# Altium PCB Candunio.PcbDoc (part 1 of 2)
Units mm, origin at the board's own origin, x right, y up, seen from the top; angles counter-clockwise.
Board outline 46 x 46 mm, 2 copper layers (Top Layer, Bottom Layer); 41 components, 53 nets, 179 pads, 77 vias.
Unrouted connection lines stored in the file: 2.
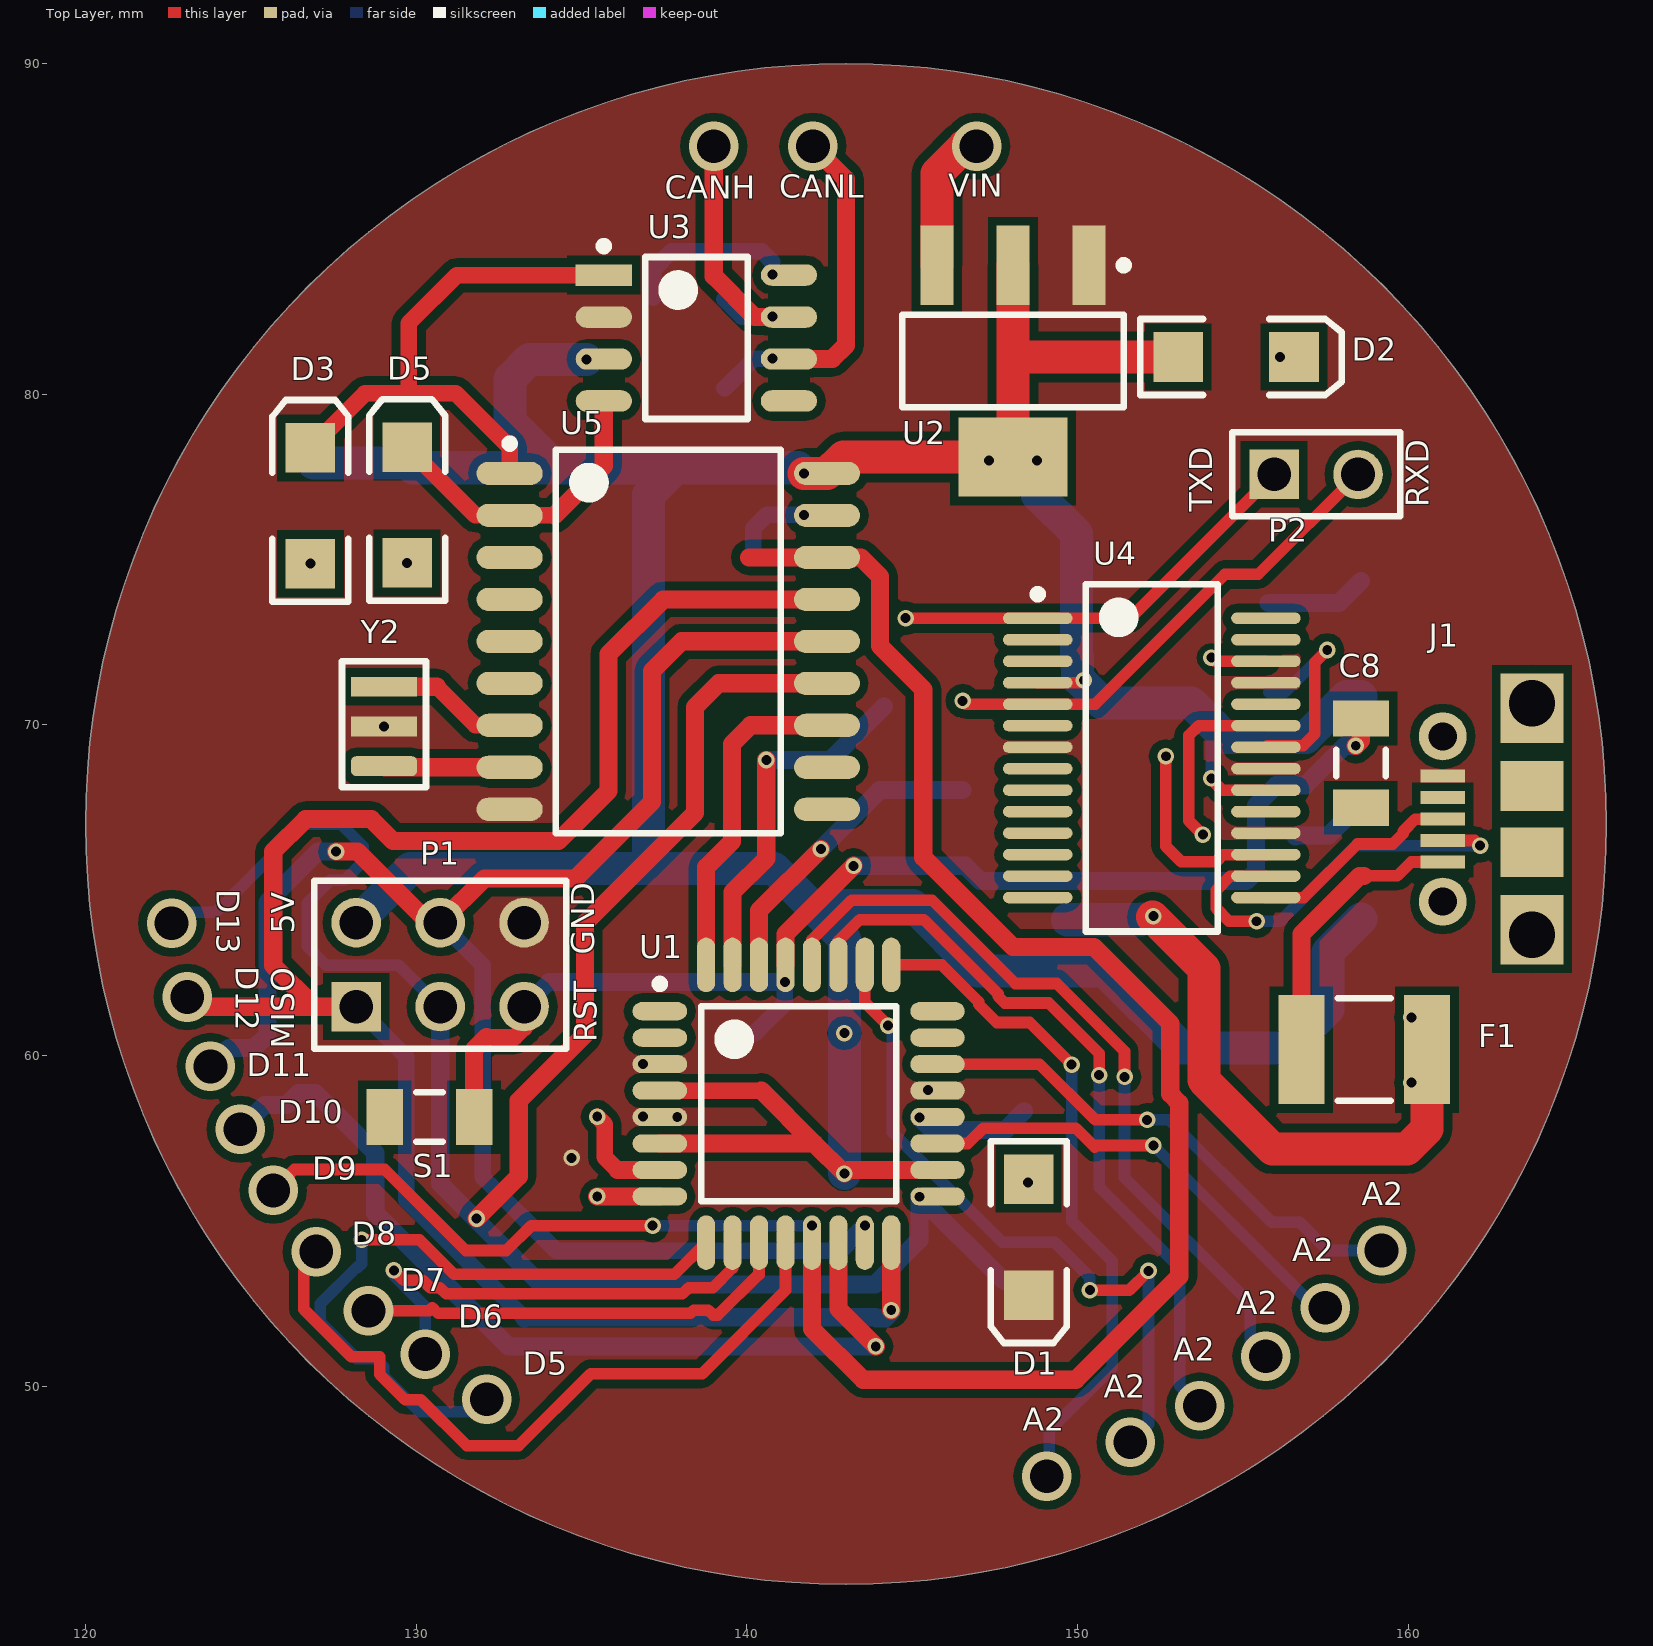
[diagram p0: Top Layer view]
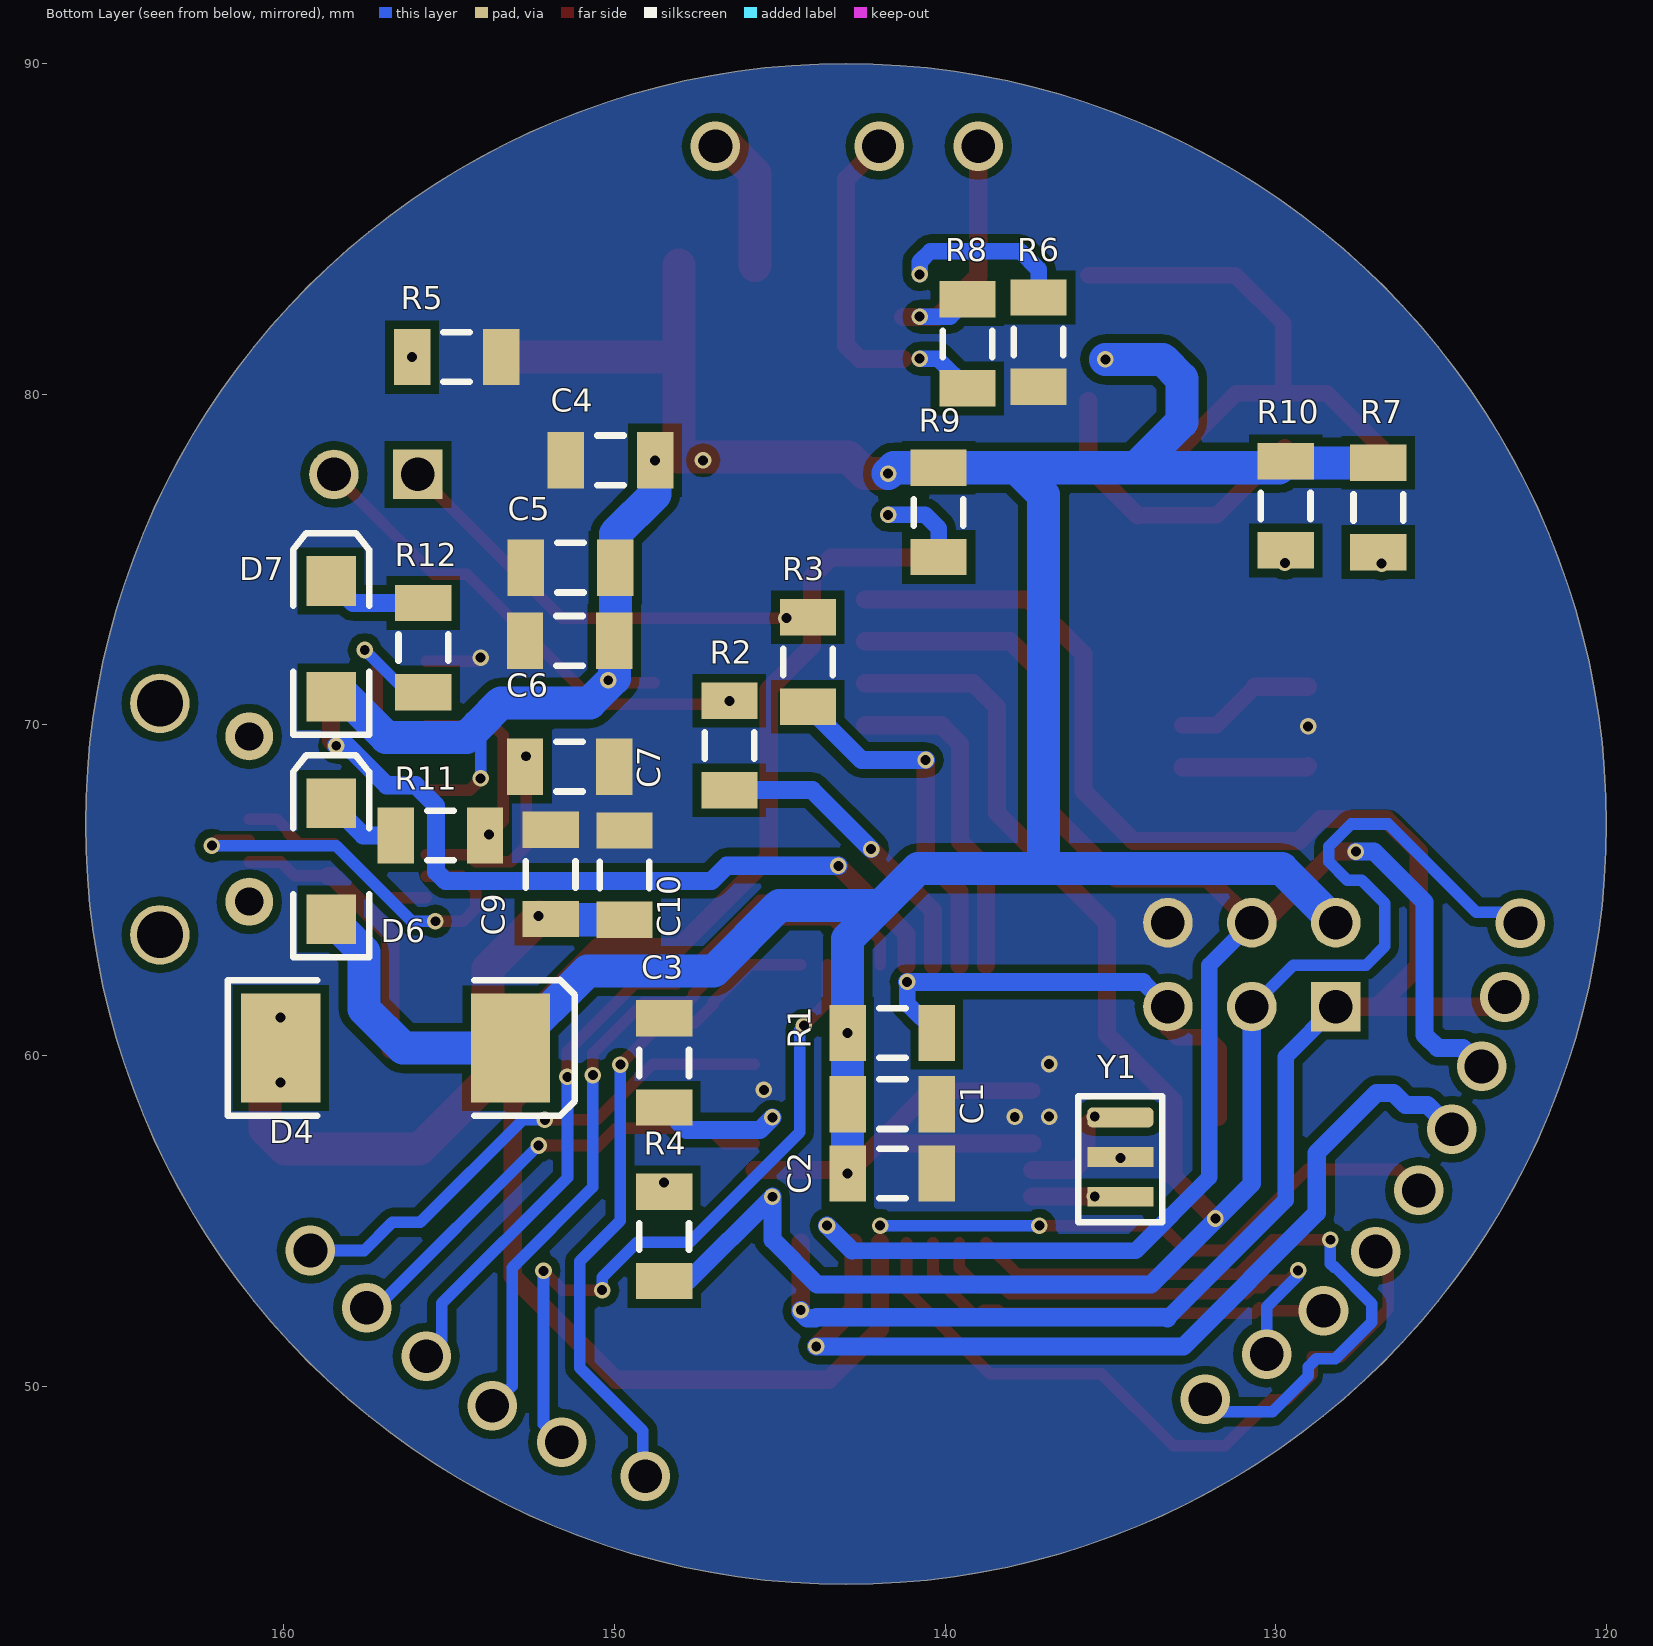
[diagram p1: Bottom Layer view, seen from below]

## Layer stack, top to bottom
Top Solder: solder mask 0.0102, Solder Resist, Dk 3.5
Top Layer: signal copper 0.0356
Dielectric 1: dielectric 0.32, FR-4, Dk 4.8
Bottom Layer: signal copper 0.0356
Bottom Solder: solder mask 0.0102, Solder Resist, Dk 3.5

## Board outline
120,67 cw(c143,67) 143,90 cw(c143,67) 166,67 cw(c143,67) 143,44 cw(c143,67) 120,67

## Design rules (kind name [scope] priority, off if disabled: settings)
Clearance [All] p1: gap=0.254 ignorepadtopadclearanceinfootprint=FALSE except(0: Arc-Hole Track-Hole SMDPad-Hole THPad-Hole Via-Hole Fill-Hole Poly-Hole Region-Hole Text-Hole; 0.24: Arc-Arc Arc-Track Arc-SMDPad Track-Track Track-SMDPad SMDPad-SMDPad)
PlaneConnect [All] p1: planeconnectstyle=Direct reliefexpansion=0.508 reliefentries=4 reliefconductorwidth=0.254 reliefairgap=0.254
PolygonConnect [All] p1: connectstyle=Direct reliefconductorwidth=0.254 reliefentries=4 polygonreliefangle="90 Angle" airgapwidth=0.254
RoutingVias [All] p1: holewidth=0.3 width=0.5 viastyle="Through Hole" minholewidth=0.3 minwidth=0.5 maxholewidth=0.3 maxwidth=0.5 viatemplateguid#1={BD94946F-5F4F-4AE1-884C-F64635037A37} viatemplatename#1=v50h30
SolderMaskExpansion [All] p1: expansion=0.102
Width [All] p1: maxlimit=1 minlimit=0.35 preferedwidth=0.55
29 further rules are at their usual default settings.

## Components (designator, comment, footprint, x,y, rotation, side; value= is the part's Value field where it differs from the comment)
C1 "Cap Pol3" C1206 141.6,58.525 r180 bottom value=4.7uF
C2 "1uF" C1206 141.6,56.425 r180 bottom
C3 "Cap Semi" C1206 148.5,59.775 r90 bottom value=100nF
C4 "1uF" C1206 150.125,78 r0 bottom
C5 "Cap Pol3" C1206 151.333,74.752 r0 bottom value=4.7uF
C6 "Cap Semi" C1206 151.359,72.542 r0 bottom value=100nF
C7 "Cap Semi" C1206 151.359,68.732 r180 bottom value=100nF
C8 "Cap Semi" C1206 158.575,68.842 r270 top value=100nF
C9 "Cap Pol3" C1206 151.931,65.477 r90 bottom value=4.7uF
C10 "1uF" C1206 149.696,65.455 r90 bottom
D1 "Red" 3.2X1.6X1.1 148.525,54.5 r270 top
D2 "Green" 3.2X1.6X1.1 154.8,81.125 r0 top
D3 "Yellow" 3.2X1.6X1.1 126.8,76.625 r90 top
D4 "Diode" SMC 156.625,60.225 r180 bottom
D5 "Yellow" 3.2X1.6X1.1 129.725,76.65 r90 top
D6 "Yellow" 3.2X1.6X1.1 158.575,65.875 r90 bottom
D7 "Yellow" 3.2X1.6X1.1 158.575,72.6 r90 bottom
F1 "Fuse 2" 1812 158.675,60.175 r180 top
J1 "USB micro B" 1050170001 163.75,67.15 r90 top
P1 "ICSP" HDR2X3_CEN 128.185,61.475 r0 top
P2 "Serial" HDR1X2 155.95,77.575 r0 top
R1 "1K" C1206 141.6,60.675 r180 bottom
R2 "1K" C1206 146.525,69.375 r90 bottom
R3 "1K" C1206 144.15,71.9 r90 bottom
R4 "1K" C1206 148.5,54.525 r270 bottom
R5 "1K" C1206 154.775,81.125 r180 bottom
R6 "16.9K" C1206 137.175,81.575 r90 bottom
R7 "1K" C1206 126.9,76.575 r270 bottom
R8 "120" C1206 139.325,81.525 r270 bottom
R9 "10K" C1206 140.2,76.425 r90 bottom
R10 "1K" C1206 129.7,76.625 r90 bottom
R11 "1K" C1206 155.27,66.65 r0 bottom
R12 "1K" C1206 155.787,72.333 r90 bottom
S1 "SW-PB" C1206 130.4,58.137 r180 top
U1 "ATmega328P-AU" 32A_N 141.569,58.537 r0 top
U2 "LM1117IMPX-5.0" MP04A_N 148.05,81 r270 top
U3 "MCP2551-E/SN" SOIC127P600X175-8M 138.475,81.7 r0 top
U4 "FT232RL-Reel" SSOP-28_N 152.25,69 r0 top
U5 "MCP2515-E/ST" SOIC127P1030X265-18M 137.625,72.525 r0 top
Y1 "CSTCE16M0V53-R0" CSTCE16M0V53-R0 134.7,58.125 r270 bottom
Y2 "CSTCE16M0V53-R0" CSTCE16M0V53-R0 129.025,68.75 r90 top

## Footprints (in the part's own frame and the unit in brackets; to place one, negate y for a bottom-side part, rotate by r counter-clockwise, add the part's x,y. Pads: shape width x height; smd on the part's side, far side on the other; paste and mask are expansions set on the pad)
3.2X1.6X1.1 [mm] "SMT LED; 2 Flat Leads"
  rect 1.5x1.5 smd: 1(-1.75,0) 2(1.75,0)
  silkscreen extent -2.9,-1.15 3.2,1.15
32A_N [mm] "Thin QFP, 32-Leads, Body 7x7mm, Pitch 0.8mm, IPC Medium Density"
  oval 1.65x0.55 smd: 1(-4.2,2.8) 2(-4.2,2) 3(-4.2,1.2) 4(-4.2,0.4) 5(-4.2,-0.4) 6(-4.2,-1.2) 7(-4.2,-2) 8(-4.2,-2.8) 17(4.2,-2.8) 18(4.2,-2) 19(4.2,-1.2) 20(4.2,-0.4) 21(4.2,0.4) 22(4.2,1.2) 23(4.2,2) 24(4.2,2.8)
  oval 0.55x1.65 smd: 9(-2.8,-4.2) 10(-2,-4.2) 11(-1.2,-4.2) 12(-0.4,-4.2) 13(0.4,-4.2) 14(1.2,-4.2) 15(2,-4.2) 16(2.8,-4.2) 25(2.8,4.2) 26(2,4.2) 27(1.2,4.2) 28(0.4,4.2) 29(-0.4,4.2) 30(-1.2,4.2) 31(-2,4.2) 32(-2.8,4.2)
  silkscreen extent -4.32,-2.95 2.95,3.75, body extent -3.5,-3.5 3.5,3.5, height 1.2
1812 [mm] "Chip Capacitor, Body 4.5x3.2mm, IPC High Density"
  rect 1.4x3.3 smd: 1(-1.9,0) 2(1.9,0)
  silkscreen extent -0.8,-1.55 0.8,1.55, body extent -2.4,-1.7 2.4,1.7, height 1.4
1050170001 [mm] "CONN USB MICRO MOLEX MODIFIED FOR DRILL HITS"
  round 1.8 hole 1.4: 0(-3.5,0) 0(3.5,0)
  rect 2.1x1.9 smd: 0(-3.35,0) 0(3.35,0)
  round 1.45 hole 0.85: 0(-2.5,2.7) 0(2.5,2.7)
  rect 1.5x1.9 smd: 0(-1,0) 0(1,0)
  rect 0.4x1.35 smd: 1(-1.3,2.7) 2(-0.65,2.7) 3(0,2.7) 4(0.65,2.7) 5(1.3,2.7)
  body extent -4.1,-2.5 4.1,2.9, height 2.78
C1206 [mm] "Chip Capacitor, Body 3.2x1.6mm, IPC High Density"
  rect 1.1x1.7 smd: 1(-1.35,0) 2(1.35,0)
  silkscreen extent -0.4,-0.75 0.4,0.75, body extent -1.7,-0.9 1.7,0.9, height 1.3
CSTCE16M0V53-R0 [mm] "16MHz Resonator"
  rrect50% 0.6x2 smd: 1(0,0)
  rect 0.6x2 smd: 2(1.2,0) 3(2.4,0)
  silkscreen extent -0.63,-1.27 3.18,1.27
HDR1X2 [mm] "Connector; Header; 2 Position"
  rect 1.5x1.5 hole 1.02: 1(0,0)
  round 1.5 hole 1.02: 2(2.54,0)
  silkscreen extent -1.27,-1.27 3.81,1.27
HDR2X3_CEN [mm] "Connector; Header; 3x2 Position"
  rect 1.5x1.5 hole 1.02: 1(0,0)
  round 1.5 hole 1.02: 2(2.54,0) 3(5.08,0) 4(0,2.54) 5(2.54,2.54) 6(5.08,2.54)
  silkscreen extent -1.27,-1.27 6.35,3.81
MP04A_N [mm] "SOT223, 4-Leads, Body 6.5x3.5mm, Pitch 2.3mm, Lead Span 7mm, IPC Medium Density"
  rect 2.4x1 smd: 1(-2.9,2.3) 2(-2.9,0) 3(-2.9,-2.3)
  rect 2.4x3.3 smd: 4(2.9,0)
  silkscreen extent -3.02,-3.35 1.4,3.48, body extent -1.85,-3.35 1.85,3.35, height 1.8
SMC [mm] "DO-214-AB/SMC; 2 C-Bend Leads; Body 7.9 x 5.9 mm, inc. leads (LxW)"
  rect 2.4x3.3 smd: 1(-3.475,0) 2(3.475,0)
  silkscreen extent -5.08,-2.05 5.42,2.05
SOIC127P600X175-8M [mm] "SOIC, 8-Leads, Body 4.90x3.90mm, Pitch 1.27mm, IPC Low Density"
  rect 1.7x0.65 smd: 1(-2.8,1.905)
  oval 1.7x0.65 smd: 2(-2.8,0.635) 3(-2.8,-0.635) 4(-2.8,-1.905) 5(2.8,-1.905) 6(2.8,-0.635) 7(2.8,0.635) 8(2.8,1.905)
  silkscreen extent -2.92,-2.45 1.55,2.9, body extent -1.95,-2.45 1.95,2.45, height 1.75
SOIC127P1030X265-18M [mm] "SOIC, 18-Leads, Body 11.50x7.50mm, Pitch 1.27mm, IPC Low Density"
  oval 2x0.7 smd: 1(-4.8,5.08) 2(-4.8,3.81) 3(-4.8,2.54) 4(-4.8,1.27) 5(-4.8,0) 6(-4.8,-1.27) 7(-4.8,-2.54) 8(-4.8,-3.81) 9(-4.8,-5.08) 10(4.8,-5.08) 11(4.8,-3.81) 12(4.8,-2.54) 13(4.8,-1.27) 14(4.8,0) 15(4.8,1.27) 16(4.8,2.54) 17(4.8,3.81) 18(4.8,5.08)
  silkscreen extent -4.92,-5.8 3.4,6.1, body extent -3.8,-5.8 3.8,5.8, height 2.65
SSOP-28_N [mm] "SOP, 28-Leads, Body 10.2x5.3mm, Pitch 0.65mm, IPC Medium Density"
  oval 2.1x0.35 smd: 1(-3.45,4.225) 2(-3.45,3.575) 3(-3.45,2.925) 4(-3.45,2.275) 5(-3.45,1.625) 6(-3.45,0.975) 7(-3.45,0.325) 8(-3.45,-0.325) 9(-3.45,-0.975) 10(-3.45,-1.625) 11(-3.45,-2.275) 12(-3.45,-2.925) 13(-3.45,-3.575) 14(-3.45,-4.225) 15(3.45,-4.225) 16(3.45,-3.575) 17(3.45,-2.925) 18(3.45,-2.275) 19(3.45,-1.625) 20(3.45,-0.975) 21(3.45,-0.325) 22(3.45,0.325) 23(3.45,0.975) 24(3.45,1.625) 25(3.45,2.275) 26(3.45,2.925) 27(3.45,3.575) 28(3.45,4.225)
  silkscreen extent -3.57,-5.25 2,5.25, body extent -2.8,-5.25 2.8,5.25, height 2

## Part data
C1 C5 C9: "Polarized Capacitor (Surface Mount)", Capacitance=4.7uF, Case/Package=1206, Case Code (Metric)=3216, Dielectric=X7R, Manufacturer="Kyocera AVX", Manufacturer Part Number=12063C475KAT2A, Max Operating Temperature=125°C, Min Operating Temperature=-55°C, Package Quantity=1, Supplier Part Number=1276-1055-1-ND, Tolerance=10%, Voltage=25V, Case Code (Imperial)=1206, ComponentLink1Description=https://datasheet.ciiva.com/2988/cx7r-2988115.pdf, ComponentLink1URL=https://datasheet.ciiva.com/2988/cx7r-2988115.pdf, ComponentLink2Description=https://datasheet.ciiva.com/7833/84526-7833366.pdf, ComponentLink2URL=https://datasheet.ciiva.com/7833/84526-7833366.pdf, ComponentLink3Description=https://datasheet.ciiva.com/16315/cx7r-16315830.pdf, ComponentLink3URL=https://datasheet.ciiva.com/16315/cx7r-16315830.pdf, ComponentLink4Description=https://datasheet.ciiva.com/153/cx7r-153207.pdf, ComponentLink4URL=https://datasheet.ciiva.com/153/cx7r-153207.pdf, ComponentLink5Description=https://datasheet.ciiva.com/7833/84526-7833367.pdf, ComponentLink5URL=https://datasheet.ciiva.com/7833/84526-7833367.pdf, ComponentLink6Description=https://datasheet.ciiva.com/153/cx7r-153208.pdf, ComponentLink6URL=https://datasheet.ciiva.com/153/cx7r-153208.pdf, ComponentLink7Description=https://datasheet.ciiva.com/7833/cx7r-7833368.pdf, ComponentLink7URL=https://datasheet.ciiva.com/7833/cx7r-7833368.pdf, ComponentLink8Description=https://datasheet.ciiva.com/153/cx7r-153209.pdf, ComponentLink8URL=https://datasheet.ciiva.com/153/cx7r-153209.pdf, ComponentLink9Description=https://datasheet.ciiva.com/5417/cx7r-218113-5417949.pdf, ComponentLink9URL=https://datasheet.ciiva.com/5417/cx7r-218113-5417949.pdf, ComponentLink10Description=https://datasheet.ciiva.com/28611/cx7r-28611725.pdf, ComponentLink10URL=https://datasheet.ciiva.com/28611/cx7r-28611725.pdf, ComponentLink11Description=https://datasheet.ciiva.com/11786/0900766b80dc2409-11786382.pdf, ComponentLink11URL=https://datasheet.ciiva.com/11786/0900766b80dc2409-11786382.pdf, Contact Plating=Tin,Matte, Depth=1.6mm, Height=1.78mm, LatestRevisionDate=29-May-2009, LatestRevisionNote="IPC-7351 Footprint Added.", Lead Free="Lead Free", Length=3.2mm, Mount="Surface Mount", Number of Pins=2, PackageDescription="Chip Capacitor", PackageReference=C0805, Packaging="Tape and Reel", Pricing 1="1=0.5, 10=0.345, 100=0.207, 500=0.15526, 1000=0.1311 (USD)", Published=8-Jun-2000, Publisher="Altium Limited", Radiation Hardening=No, REACH SVHC="No SVHC", Stock 1=0, Supplier 1=Digi-Key, Supplier 2=Digi-Key, Termination=SMD/SMT, Thickness=0.07inch, Voltage Rating=25V, Voltage Rating (DC)=25V, Width=0.063inch
C2 C4 C10: library part "Cap Semi", "Capacitor (Semiconductor SIM Model)", Case/Package=1206, Case Code (Metric)=3216, Dielectric=X7R, Manufacturer=Murata, Manufacturer Part Number=GRM31MR71H105KA88L, Max Operating Temperature=125°C, Min Operating Temperature=-55°C, Package Quantity=1, Supplier Part Number=490-14756-1-ND, Tolerance=10%, Voltage=50V, Capacitance=1uF, Case Code (Imperial)=1206, ComponentLink1Description=https://datasheet.ciiva.com/16379/product-16379616.pdf, ComponentLink1URL=https://datasheet.ciiva.com/16379/product-16379616.pdf, ComponentLink2Description=https://datasheet.ciiva.com/14116/nmgrm-data-en-14116709.pdf, ComponentLink2URL=https://datasheet.ciiva.com/14116/nmgrm-data-en-14116709.pdf, ComponentLink3Description=https://datasheet.ciiva.com/22703/608985-22703384.pdf, ComponentLink3URL=https://datasheet.ciiva.com/22703/608985-22703384.pdf, ComponentLink4Description=https://datasheet.ciiva.com/3777/42grm31mr71h105ka8823-3777081.pdf, ComponentLink4URL=https://datasheet.ciiva.com/3777/42grm31mr71h105ka8823-3777081.pdf, ComponentLink5Description=https://datasheet.ciiva.com/6270/partnumbering-e-01-6270398.pdf, ComponentLink5URL=https://datasheet.ciiva.com/6270/partnumbering-e-01-6270398.pdf, ComponentLink6Description=https://datasheet.ciiva.com/6270/partnumbering-e-01-6270399.pdf, ComponentLink6URL=https://datasheet.ciiva.com/6270/partnumbering-e-01-6270399.pdf, ComponentLink7Description=https://datasheet.ciiva.com/29199/455056-da-01-en-vs-kondensator-1206-29199449.pdf, ComponentLink7URL=https://datasheet.ciiva.com/29199/455056-da-01-en-vs-kondensator-1206-29199449.pdf, ComponentLink8Description=https://datasheet.ciiva.com/29202/450923-da-01-de-vs-chip-kond-1206-1-0-uf-10pr-50-0v-x7r-29202718.pdf, ComponentLink8URL=https://datasheet.ciiva.com/29202/450923-da-01-de-vs-chip-kond-1206-1-0-uf-10pr-50-0v-x7r-29202718.pdf, Depth=1.6mm, Height=1.15mm, LatestRevisionDate=29-May-2009, LatestRevisionNote="IPC-7351 Footprint Added.", Lead Free="Lead Free", Length=3.2mm, Material=Ceramic, Mount="Surface Mount", Number of Pins=2, PackageDescription="Chip Capacitor", PackageReference=C1206, Packaging="Tape and Reel", Published=8-Jun-2000, Publisher="Altium Limited", REACH SVHC="No SVHC", Stock 1=0, Supplier 1=Digi-Key, Supplier 2=Digi-Key, Termination=SMD/SMT, Thickness=0.049inch, Voltage Rating=50V, Voltage Rating (DC)=50V, Width=0.063inch
C3 C6 C7 C8: "Capacitor (Semiconductor SIM Model)", Capacitance=100nF, Case/Package=1206, Case Code (Metric)=3216, Dielectric=X7R, Dielectric Material=Ceramic, Manufacturer=Yageo, Manufacturer Part Number=CC1206KKX7R0BB104, Max Operating Temperature=125°C, Min Operating Temperature=-55°C, Package Quantity=1, Supplier Part Number=1276-1151-1-ND, Tolerance=10%, Voltage=63V, Voltage Rating=100V, Case Code (Imperial)=1206, ComponentLink1Description=https://datasheet.ciiva.com/180/mlccorderingcode-180144.pdf, ComponentLink1URL=https://datasheet.ciiva.com/180/mlccorderingcode-180144.pdf, ComponentLink2Description=https://datasheet.ciiva.com/180/mlccorderingcode-180145.pdf, ComponentLink2URL=https://datasheet.ciiva.com/180/mlccorderingcode-180145.pdf, ComponentLink3Description=https://datasheet.ciiva.com/180/mlccorderingcode-180146.pdf, ComponentLink3URL=https://datasheet.ciiva.com/180/mlccorderingcode-180146.pdf, ComponentLink4Description=https://datasheet.ciiva.com/7978/1447671-7978227.pdf, ComponentLink4URL=https://datasheet.ciiva.com/7978/1447671-7978227.pdf, ComponentLink5Description=https://datasheet.ciiva.com/5425/upy-gp-np0-16v-to-50v-8-5425573.pdf, ComponentLink5URL=https://datasheet.ciiva.com/5425/upy-gp-np0-16v-to-50v-8-5425573.pdf, ComponentLink6Description=https://datasheet.ciiva.com/26829/getdatasheetpartid-403790-26829655.pdf, ComponentLink6URL=https://datasheet.ciiva.com/26829/getdatasheetpartid-403790-26829655.pdf, ComponentLink7Description=https://datasheet.ciiva.com/46391/1919308-46391993.pdf, ComponentLink7URL=https://datasheet.ciiva.com/46391/1919308-46391993.pdf, ComponentLink8Description=https://datasheet.ciiva.com/16981/upy-np0x7r-mv-100-to-630v-9-16981180.pdf, ComponentLink8URL=https://datasheet.ciiva.com/16981/upy-np0x7r-mv-100-to-630v-9-16981180.pdf, Composition=Ceramic, Depth=1.6mm, Height=1.25mm, LatestRevisionDate=29-May-2009, LatestRevisionNote="IPC-7351 Footprint Added.", Lead Free="Lead Free", Length=3.2mm, Mount="Surface Mount", Number of Pins=2, PackageDescription="Chip Capacitor", PackageReference=C1206, Packaging="Tape and Reel", Pricing 1="1=0.32, 10=0.221, 100=0.1117, 500=0.07646, 1000=0.06763 (USD)", Published=8-Jun-2000, Publisher="Altium Limited", Radiation Hardening=No, REACH SVHC="No SVHC", Stock 1=0, Supplier 1=Digi-Key, Supplier 2=Digi-Key, Termination=SMD/SMT, Thickness=0.057inch, Voltage Rating (DC)=100V, Width=0.063inch
D1: library part LED2, "Typical RED, GREEN, YELLOW, AMBER GaAs LED", Case/Package=1206, Case Code (Metric)=3216, Colour=Yellow, Forward Current=20mA, Forward Voltage=2.1V, Lens Colour=White,Clear, Manufacturer="Broadcom Avago", Manufacturer Part Number=HSMY-C150, Max Operating Temperature=85°C, Max Power Dissipation=65mW, Min Operating Temperature=-40°C, Package Quantity=1, Reverse Voltage=5V, Supplier Part Number=516-1440-1-ND, Case Code (Imperial)=1206, ComponentLink1Description=https://datasheet.ciiva.com/15117/getdatasheetpartid-110528-15117488.pdf, ComponentLink1URL=https://datasheet.ciiva.com/15117/getdatasheetpartid-110528-15117488.pdf, ComponentLink2Description=https://datasheet.ciiva.com/11774/0900766b804a6539-11774578.pdf, ComponentLink2URL=https://datasheet.ciiva.com/11774/0900766b804a6539-11774578.pdf, ComponentLink3Description=https://datasheet.ciiva.com/19466/1557071-19466435.pdf, ComponentLink3URL=https://datasheet.ciiva.com/19466/1557071-19466435.pdf, ComponentLink4Description=https://datasheet.ciiva.com/14172/swseriehsmx-c150toc190-e-14172159.pdf, ComponentLink4URL=https://datasheet.ciiva.com/14172/swseriehsmx-c150toc190-e-14172159.pdf, ComponentLink5Description=https://datasheet.ciiva.com/29280/180507-da-01-en-chip-led-hsmy-c150-gelb-29280997.pdf, ComponentLink5URL=https://datasheet.ciiva.com/29280/180507-da-01-en-chip-led-hsmy-c150-gelb-29280997.pdf, ComponentLink6Description=https://datasheet.ciiva.com/11773/0900766b804a6539-11773956.pdf, ComponentLink6URL=https://datasheet.ciiva.com/11773/0900766b804a6539-11773956.pdf, ComponentLink7Description=https://datasheet.ciiva.com/15117/getdatasheetpartid-142358-15117749.pdf, ComponentLink7URL=https://datasheet.ciiva.com/15117/getdatasheetpartid-142358-15117749.pdf, ComponentLink8Description=https://datasheet.ciiva.com/46426/313031-46426533.pdf, ComponentLink8URL=https://datasheet.ciiva.com/46426/313031-46426533.pdf, ComponentLink9Description=https://datasheet.ciiva.com/14172/swseriehsmx-c150toc190-e-14172156.pdf, ComponentLink9URL=https://datasheet.ciiva.com/14172/swseriehsmx-c150toc190-e-14172156.pdf, ComponentLink10Description=https://datasheet.ciiva.com/29281/180509-da-01-en-chip-led-hsmh-c150-rot-29281009.pdf, ComponentLink10URL=https://datasheet.ciiva.com/29281/180509-da-01-en-chip-led-hsmh-c150-rot-29281009.pdf, Contact Plating=Gold, Depth=1.6mm, Dominant Wavelength=586nm, Height=1.1mm, Illumination Colour=Yellow, LatestRevisionDate=17-Jul-2002, LatestRevisionNote="Re-released for DXP Platform.", Lead Free="Lead Free", Length=3.2mm, Lens Style=Diffused,Colorless,Rectangular, Lens Transparency=Diffused, Luminous Intensity=8mcd, Mount="Surface Mount", Number of Elements=1, Number of LEDs=1, Number of Pins=2, PackageDescription="SM LED; 2 Flat Leads", PackageReference=3.2X1.6X1.1, PackageVersion=Feb-2002, Packaging="Tape and Reel", Power Dissipation=65mW, Power Rating=65mW, Published=8-Jun-2000, Publisher="Altium Limited", Radiation Hardening=No, REACH SVHC="No SVHC", Stock 1=0, Stock 2=0, Supplier 1=Digi-Key, Supplier 2=Digi-Key, Supplier 3=Digi-Key, Supplier 4=Digi-Key, Test Current=20mA, Viewing Angle=170°, Voltage Rating (DC)=2.1V, Wavelength=586nm, Width=1.6mm
D2: library part LED2, "Typical RED, GREEN, YELLOW, AMBER GaAs LED", Case/Package=1206, Case Code (Metric)=3216, Colour=Green,Yellow, Forward Current=20mA, Forward Voltage=2.2V, Lens Colour=White,Clear, Manufacturer="Broadcom Avago", Manufacturer Part Number=HSMG-C150, Max Operating Temperature=85°C, Max Power Dissipation=65mW, Min Operating Temperature=-30°C, Package Quantity=1, Reverse Voltage=5V, Supplier Part Number=516-1443-1-ND, Case Code (Imperial)=1206, ComponentLink1Description=https://datasheet.ciiva.com/11774/0900766b804a6539-11774272.pdf, ComponentLink1URL=https://datasheet.ciiva.com/11774/0900766b804a6539-11774272.pdf, ComponentLink2Description=https://datasheet.ciiva.com/14172/swseriehsmx-c150toc190-e-14172162.pdf, ComponentLink2URL=https://datasheet.ciiva.com/14172/swseriehsmx-c150toc190-e-14172162.pdf, ComponentLink3Description=https://datasheet.ciiva.com/46426/313031-46426517.pdf, ComponentLink3URL=https://datasheet.ciiva.com/46426/313031-46426517.pdf, ComponentLink4Description=https://datasheet.ciiva.com/15117/getdatasheetpartid-110366-15117482.pdf, ComponentLink4URL=https://datasheet.ciiva.com/15117/getdatasheetpartid-110366-15117482.pdf, ComponentLink5Description=https://datasheet.ciiva.com/19466/1556369-19466015.pdf, ComponentLink5URL=https://datasheet.ciiva.com/19466/1556369-19466015.pdf, ComponentLink6Description=https://datasheet.ciiva.com/29280/180668-da-01-en-chip-led-hsmg-c150-gelb-gruen-29280632.pdf, ComponentLink6URL=https://datasheet.ciiva.com/29280/180668-da-01-en-chip-led-hsmg-c150-gelb-gruen-29280632.pdf, Contact Plating=Gold, Depth=1.6mm, Dominant Wavelength=572nm, Height=1.1mm, Illumination Colour=Green, LatestRevisionDate=17-Jul-2002, LatestRevisionNote="Re-released for DXP Platform.", Length=3.2mm, Lens Style=Diffused,Colorless,Rectangular, Lens Transparency=Diffused, Luminous Intensity=15mcd, Mount="Surface Mount", Number of Elements=1, Number of LEDs=1, Number of Pins=2, PackageDescription="SM LED; 2 Flat Leads", PackageReference=3.2X1.6X1.1, PackageVersion=Feb-2002, Packaging="Tape and Reel", Power Dissipation=65mW, Power Rating=65mW, Published=8-Jun-2000, Publisher="Altium Limited", Radiation Hardening=No, REACH SVHC="No SVHC", Supplier 1=Digi-Key, Supplier 2=Digi-Key, Test Current=20mA, Viewing Angle=170°, Wavelength=572nm, Width=1.6mm
D3 D5 D6 D7: library part LED2, "Typical RED, GREEN, YELLOW, AMBER GaAs LED", Case/Package=1206, Case Code (Metric)=3216, Forward Current=20mA, Forward Voltage=2.1V, Lens Colour=White,Clear, Manufacturer="Broadcom Avago", Manufacturer Part Number=HSMY-C150, Max Operating Temperature=85°C, Max Power Dissipation=65mW, Min Operating Temperature=-40°C, Package Quantity=1, Reverse Voltage=5V, Supplier Part Number=516-1442-1-ND, Case Code (Imperial)=1206, Colour=Yellow, ComponentLink1Description=https://datasheet.ciiva.com/15117/getdatasheetpartid-110528-15117488.pdf, ComponentLink1URL=https://datasheet.ciiva.com/15117/getdatasheetpartid-110528-15117488.pdf, ComponentLink2Description=https://datasheet.ciiva.com/11774/0900766b804a6539-11774578.pdf, ComponentLink2URL=https://datasheet.ciiva.com/11774/0900766b804a6539-11774578.pdf, ComponentLink3Description=https://datasheet.ciiva.com/19466/1557071-19466435.pdf, ComponentLink3URL=https://datasheet.ciiva.com/19466/1557071-19466435.pdf, ComponentLink4Description=https://datasheet.ciiva.com/14172/swseriehsmx-c150toc190-e-14172159.pdf, ComponentLink4URL=https://datasheet.ciiva.com/14172/swseriehsmx-c150toc190-e-14172159.pdf, ComponentLink5Description=https://datasheet.ciiva.com/29280/180507-da-01-en-chip-led-hsmy-c150-gelb-29280997.pdf, ComponentLink5URL=https://datasheet.ciiva.com/29280/180507-da-01-en-chip-led-hsmy-c150-gelb-29280997.pdf, Contact Plating=Gold, Depth=1.6mm, Dominant Wavelength=586nm, Height=1.1mm, Illumination Colour=Yellow, LatestRevisionDate=17-Jul-2002, LatestRevisionNote="Re-released for DXP Platform.", Lead Free="Lead Free", Length=3.2mm, Lens Style=Diffused,Colorless,Rectangular, Lens Transparency=Diffused, Luminous Intensity=8mcd, Mount="Surface Mount", Number of Elements=1, Number of LEDs=1, Number of Pins=2, PackageDescription="SM LED; 2 Flat Leads", PackageReference=3.2X1.6X1.1, PackageVersion=Feb-2002, Packaging="Tape and Reel", Power Dissipation=65mW, Power Rating=65mW, Published=8-Jun-2000, Publisher="Altium Limited", Radiation Hardening=No, REACH SVHC="No SVHC", Stock 1=0, Supplier 1=Digi-Key, Supplier 2=Digi-Key, Test Current=20mA, Viewing Angle=170°, Voltage Rating (DC)=2.1V, Wavelength=586nm, Width=1.6mm
D4: "Default Diode", Supplier Part Number=SS1P3L-M3/84AGICT-ND, Code_JEDEC=DO-214-AB, LatestRevisionDate=17-Jul-2002, LatestRevisionNote="Re-released for DXP Platform.", PackageDescription="DO-214-AB/SMC; 2 C-Bend Leads; Body 7.9 x 5.9 mm, inc. leads (LxW)", PackageReference=SMC, PackageVersion=Sep-1996, Published=8-Jun-2000, Publisher="Altium Limited", Supplier 1=Digi-Key, Supplier 2=Digi-Key
F1: "Fuse", Case/Package=1812, Case Code (Metric)=4532, Current Rating=100A, Hold Current=500mA, Manufacturer=Bourns, Manufacturer Part Number=MF-MSMF050-2, Max Operating Temperature=85°C, Min Operating Temperature=-40°C, Operating Supply Voltage=15V, Package Quantity=2000, Power Dissipation=800mW, Resistance=150mR, Supplier Part Number=?MF-MSMF050-2CT-ND, Trip Current=1A, Approvals=UL,CSA,TUV, Case Code (Imperial)=1812, ComponentLink1Description=https://datasheet.ciiva.com/326/mfmsmf-326354.pdf, ComponentLink1URL=https://datasheet.ciiva.com/326/mfmsmf-326354.pdf, ComponentLink2Description=https://datasheet.ciiva.com/1228/1786007-1228155.pdf, ComponentLink2URL=https://datasheet.ciiva.com/1228/1786007-1228155.pdf, ComponentLink3Description=https://datasheet.ciiva.com/16205/mfmsmf-16205994.pdf, ComponentLink3URL=https://datasheet.ciiva.com/16205/mfmsmf-16205994.pdf, ComponentLink4Description=https://datasheet.ciiva.com/34302/1164200-34302041.pdf, ComponentLink4URL=https://datasheet.ciiva.com/34302/1164200-34302041.pdf, ComponentLink5Description=https://datasheet.ciiva.com/14537/70153434-14537737.pdf, ComponentLink5URL=https://datasheet.ciiva.com/14537/70153434-14537737.pdf, ComponentLink6Description=https://datasheet.ciiva.com/46395/1695373-46395287.pdf, ComponentLink6URL=https://datasheet.ciiva.com/46395/1695373-46395287.pdf, ComponentLink7Description=https://datasheet.ciiva.com/22749/1695373-22749079.pdf, ComponentLink7URL=https://datasheet.ciiva.com/22749/1695373-22749079.pdf, ComponentLink8Description=https://datasheet.ciiva.com/32426/mf-msmf-series-eng-tds-32426126.pdf, ComponentLink8URL=https://datasheet.ciiva.com/32426/mf-msmf-series-eng-tds-32426126.pdf, ComponentLink9Description=https://datasheet.ciiva.com/4501/mfmsmf-72300-4501655.pdf, ComponentLink9URL=https://datasheet.ciiva.com/4501/mfmsmf-72300-4501655.pdf, ComponentLink10Description=https://datasheet.ciiva.com/3019/mfmsmf-3019622.pdf, ComponentLink10URL=https://datasheet.ciiva.com/3019/mfmsmf-3019622.pdf, ComponentLink11Description=https://datasheet.ciiva.com/3019/mfmsmf-3019621.pdf, ComponentLink11URL=https://datasheet.ciiva.com/3019/mfmsmf-3019621.pdf, ComponentLink12Description=https://datasheet.ciiva.com/326/mfmsmf-326356.pdf, ComponentLink12URL=https://datasheet.ciiva.com/326/mfmsmf-326356.pdf, ComponentLink13Description=https://datasheet.ciiva.com/1274/1786007-1274499.pdf, ComponentLink13URL=https://datasheet.ciiva.com/1274/1786007-1274499.pdf, ComponentLink14Description=https://datasheet.ciiva.com/326/mfmsmf-326355.pdf, ComponentLink14URL=https://datasheet.ciiva.com/326/mfmsmf-326355.pdf, ComponentLink15Description=https://datasheet.ciiva.com/1274/1786007-1274498.pdf, ComponentLink15URL=https://datasheet.ciiva.com/1274/1786007-1274498.pdf, ComponentLink16Description=https://datasheet.ciiva.com/15226/getdatasheetpartid-117168-15226886.pdf, ComponentLink16URL=https://datasheet.ciiva.com/15226/getdatasheetpartid-117168-15226886.pdf, ComponentLink17Description=https://datasheet.ciiva.com/25894/mfmsmf-25894175.pdf, ComponentLink17URL=https://datasheet.ciiva.com/25894/mfmsmf-25894175.pdf, Contact Plating=Gold, Height=0.85mm, LatestRevisionDate=17-Jul-2002, LatestRevisionNote="Re-released for DXP Platform.", Lead Free="Lead Free", Length=4.73mm, Max Current Rating=100A, Mount="Surface Mount,PCB", Number of Terminals=2, PackageDescription="Thru-Hole; 2 Leads", PackageReference=PIN-W2/E2.8, Packaging="Tape and Reel", Part number=MF-MSMF050-2, Pricing 1="2000=0.2898, 4000=0.28463, 6000=0.27945, 10000=0.2691 (USD)", Published=8-Jun-2000, Publisher="Altium Limited", Radiation Hardening=No, REACH SVHC="No SVHC", Stock 1=126000, Supplier 1=Digi-Key, Terminal Material=Gold, Termination=SMD/SMT, Time to Trip=0.15s, Voltage Rating=15V, Voltage Rating (DC)=15V, Width=3.41mm
J1: library part 1050170001, "CONN SM TH USB MICRO MODIFIED FOR DRILL", Part number=WM1399CT-ND, Supplier Part Number=609-4618-1-ND, Details="Modified from reference footprint for standard drill hits (rather than slots)", Supplier 1=Digi-Key
P1: library part "Header 3X2A", "Header, 3-Pin, Dual row", LatestRevisionDate=17-Jul-2002, LatestRevisionNote="Re-released for DXP Platform.", Publisher="Altium Limited"
P2: library part "Header 2", "Header, 2-Pin", LatestRevisionDate=17-Jul-2002, LatestRevisionNote="Re-released for DXP Platform.", Publisher="Altium Limited"
R1 R2 R3 R4 R5 R7 R10 R11 R12: library part Res1, "Resistor", Case/Package=1206, Case Code (Metric)=3216, Manufacturer="Stackpole Electronics", Manufacturer Part Number=RNCP1206FTD1K00, Max Operating Temperature=155°C, Max Power Dissipation=500mW, Min Operating Temperature=-55°C, Resistance=1kR, Supplier Part Number=311-1.0KGRCT-ND, Supplier Part Number 1=RNCP1206FTD1K00DKR-ND, Temperature Coefficient=100ppm/°C, Tolerance=1%, Case Code (Imperial)=1206, ComponentLink1Description=http://www.seielect.com/Catalog/SEI-rncp.pdf, ComponentLink1URL=http://www.seielect.com/Catalog/SEI-rncp.pdf, ComponentLink2Description=https://www.seielect.com/catalog/SEI-Packaging.pdf, ComponentLink2URL=https://www.seielect.com/catalog/SEI-Packaging.pdf, Composition="Thin Film", Contact Plating=Nickel,Tin,Matte, Height=0.024inch, Lead Free="Lead Free", Length=0.122inch, Mount="Surface Mount", Number of Terminations=2, Packaging="Tape and Reel", Pricing 1="1=0.1, 10=0.052, 100=0.0211, 1000=0.00949, 2500=0.00824 (USD)", Radiation Hardening=No, Stock 1=679, Supplier 1=Digi-Key, Width=0.059inch
R6: library part Res1, "Resistor", Case/Package=1206, Case Code (Metric)=3216, Manufacturer="TE Connectivity Holsworthy", Manufacturer Part Number=CRGH1206F16K9, Max Operating Temperature=125°C, Min Operating Temperature=-55°C, Number of Resistors=1, Power Rating=500mW, Resistance=16.9kR, Supplier Part Number=541-16.9KFCT-ND, Temperature Coefficient=100ppm/°C, Tolerance=1%, Voltage Rating=200V, Case Code (Imperial)=1206, ComponentLink1Description=https://datasheet.ciiva.com/12573/eng-ds-1773204-g-12573853.pdf, ComponentLink1URL=https://datasheet.ciiva.com/12573/eng-ds-1773204-g-12573853.pdf, Composition="Thick Film,Power resistor", ELV=Compliant, Height=0.55mm, Length=3.1mm, Mount="Surface Mount", Number of Terminations=2, Packaging="Tape and Reel", Supplier 1=Digi-Key, Termination=Solder, Width=1.55mm
R8: library part Res1, "Resistor", Case/Package=1206, Case Code (Metric)=3216, Manufacturer=Vishay, Manufacturer Part Number=CRCW1206120RFKEAHP, Max Operating Temperature=155°C, Min Operating Temperature=-55°C, Package Quantity=5000, Power Rating=500mW, Resistance=120R, Supplier Part Number=541-120ECT-ND, Temperature Coefficient=100ppm/°C, Tolerance=1%, Voltage Rating=200V, Case Code (Imperial)=1206, ComponentLink1Description=https://datasheet.ciiva.com/8976/crcwhpe3-8976135.pdf, ComponentLink1URL=https://datasheet.ciiva.com/8976/crcwhpe3-8976135.pdf, ComponentLink2Description=https://datasheet.ciiva.com/48525/crcwhpe3-48525463.pdf, ComponentLink2URL=https://datasheet.ciiva.com/48525/crcwhpe3-48525463.pdf, ComponentLink3Description=https://datasheet.ciiva.com/7777/424479-7777433.pdf, ComponentLink3URL=https://datasheet.ciiva.com/7777/424479-7777433.pdf, ComponentLink4Description=https://datasheet.ciiva.com/7777/424479-7777434.pdf, ComponentLink4URL=https://datasheet.ciiva.com/7777/424479-7777434.pdf, Composition="Thick Film", Contact Plating=Tin, Depth=1.6mm, Height=0.5mm, Lead Free="Lead Free", Length=3.1mm, Military Standard=Not, Packaging="Tape and Reel", Radiation Hardening=No, REACH SVHC=Unknown, Stock 1=0, Supplier 1=Digi-Key, Supplier 2=Digi-Key, Termination=SMD/SMT, Voltage Rating (DC)=200V, Weight=0.000353oz, Width=1.6mm
R9: library part Res1, "Resistor", Case/Package=1206, Case Code (Metric)=3216, Manufacturer="Stackpole Electronics", Manufacturer Part Number=RNCP1206FTD10K0, Max Operating Temperature=155°C, Max Power Dissipation=500mW, Min Operating Temperature=-55°C, Resistance=10kR, Supplier Part Number=RNCP1206FTD10K0CT-ND, Temperature Coefficient=100ppm/°C, Tolerance=1%, Case Code (Imperial)=1206, ComponentLink1Description=http://www.seielect.com/Catalog/SEI-rncp.pdf, ComponentLink1URL=http://www.seielect.com/Catalog/SEI-rncp.pdf, Composition="Thin Film", Height=0.024inch, Length=0.122inch, Mount="Surface Mount", Number of Terminations=2, Packaging="Tape and Reel", Pricing 1="1=0.1, 10=0.052, 100=0.0211, 1000=0.00949, 2500=0.00824 (USD)", Stock 1=41487, Supplier 1=Digi-Key, Width=0.059inch
S1: "Switch", Manufacturer="ITT C&K", Manufacturer Part Number=KXT331LHS, Supplier Part Number=CKN10779CT-ND, ComponentLink1Description=https://www.ckswitches.com/media/1465/kxt3.pdf, ComponentLink1URL=https://www.ckswitches.com/media/1465/kxt3.pdf, ComponentLink2Description=http://www.ckswitches.com/media/1465/kxt3.pdf, ComponentLink2URL=http://www.ckswitches.com/media/1465/kxt3.pdf, LatestRevisionDate=17-Jul-2002, LatestRevisionNote="Re-released for DXP Platform.", PackageDescription="Switch; 2 Leads", PackageReference=SPST-2, Pricing 1="8500=0.1264 (USD)", Published=24-Mar-1999, Publisher="Altium Limited", Stock 1=42500, Supplier 1=Digi-Key
U1: "8-bit AVR Microcontroller, 32KB Flash, 1KB EEPROM, 2KB SRAM, 32-pin TQFP, Industrial Grade (-40°C to 85°C)", Supplier Part Number=ATMEGA328P-AU-ND, Code_JEDEC=MS-026-ABA, ComponentLink1Description="Manufacturer Link", ComponentLink1URL=http://www.atmel.com/products/avr/default.asp?, ComponentLink2Description="ATmega48A/48PA/88A/88PA/168A/168PA/328/328P Datasheet", ComponentLink2URL=http://www.atmel.com/dyn/resources/prod_documents/8271.pdf, ComponentLink3Description="ATmega48A/48PA/88A/88PA/168A/168PA/328/328P Summary", ComponentLink3URL=http://www.atmel.com/dyn/resources/prod_documents/8271S.pdf, ComponentLink4Description="Atmel.com Home", ComponentLink4URL=http://www.atmel.com, DatasheetVersion="revA, Jan-2010", PackageDescription="32-Lead, 7x7x1.0 mm Body, 0.8mm Lead Pitch, Thin Profile Plastic Quad Flat Package (TQFP)", PackageReference=32A, PackageVersion="revB, Oct-2001", Published=1-Apr-2010, Publisher="Altium Limited", Supplier 1=Digi-Key, Supplier 2=Farnell, Supplier 3=Mouser, Supplier Part Number 2=1715486, Supplier Part Number 3=556-ATMEGA328P-AU
U2: "800mA Low-Dropout Linear Regulator, 4-pin SOT-223", Manufacturer="National Semiconductor", PackageTopMarking=XYTT*N06B, PartNumber=LM1117IMPX-5.0/NOPBCT-ND, PowerWise=N, Code_IPC=SOT223-4, Code_JEDEC=TO-261-AA, ComponentLink1Description="LM1117 Datasheet", ComponentLink1URL=http://www.national.com/ds/LM/LM1117.pdf, ComponentLink2Description="LM1117 Web Page", ComponentLink2URL=http://www.national.com/pf/LM/LM1117.html, ComponentLink3Description="MP04A Package Page", ComponentLink3URL=http://www.national.com/packaging/folders/mp04a.html, CompType="LDO IC", DatasheetVersion=Apr-2006, PackageDescription="Molded SOT-223, 6.50 x 3.56 x 1.6mm Body, 4 Lead, 2.3mm Pitch", PackageReference=MP04A, PackageVersion="revB, Apr-2003", PinCount=4, Published=1-Mar-2010, Publisher="Altium Limited", RoHS=N, Supplier 1=Digi-Key, Supplier Part Number=LM1117IMPX-5.0/NOPBCT-ND
U3: "SOIC", Supplier Part Number=MCP2551T-E/SNCT-ND, Supplier 1=Digi-Key
U4: "USB UART Asynchronous Serial Data Transfer Chip, SSOP-28, Tape and Reel", Case/Package=SSOP, Manufacturer=FTDI, Manufacturer Part Number=FT232RL-REEL, Max Operating Temperature=85°C, Max Supply Voltage=5.25V, Min Operating Temperature=-40°C, Min Supply Voltage=3.3V, Operating Supply Current=15mA, Package Quantity=2000, Supplier Part Number=768-1007-1-ND, Voltage=5V, ComponentLink1Description="Manufacturer Link", ComponentLink1URL=http://www.ftdichip.com/Products/ICs/FT232R.htm, ComponentLink2Description=Datasheet, ComponentLink2URL=http://www.ftdichip.com/Support/Documents/DataSheets/ICs/DS_FT232R.pdf, ComponentLink3Description=https://datasheet.ciiva.com/34304/2161019-34304054.pdf, ComponentLink3URL=https://datasheet.ciiva.com/34304/2161019-34304054.pdf, ComponentLink4Description=https://datasheet.ciiva.com/1787/ds-ft232r-1787047.pdf, ComponentLink4URL=https://datasheet.ciiva.com/1787/ds-ft232r-1787047.pdf, ComponentLink5Description=https://datasheet.ciiva.com/1787/ds-ft232r-1787048.pdf, ComponentLink5URL=https://datasheet.ciiva.com/1787/ds-ft232r-1787048.pdf, ComponentLink6Description=https://datasheet.ciiva.com/1787/ds-ft232r-1787049.pdf, ComponentLink6URL=https://datasheet.ciiva.com/1787/ds-ft232r-1787049.pdf, ComponentLink7Description=https://datasheet.ciiva.com/4787/ds-ft232r-11534-4787658.pdf, ComponentLink7URL=https://datasheet.ciiva.com/4787/ds-ft232r-11534-4787658.pdf, ComponentLink8Description=https://datasheet.ciiva.com/15150/getdatasheetpartid-643207-15150506.pdf, ComponentLink8URL=https://datasheet.ciiva.com/15150/getdatasheetpartid-643207-15150506.pdf, ComponentLink9Description=https://datasheet.ciiva.com/16200/ds-ft232r-16200652.pdf, ComponentLink9URL=https://datasheet.ciiva.com/16200/ds-ft232r-16200652.pdf, ComponentLink10Description=https://datasheet.ciiva.com/26841/ft232rl-reel-26841080.pdf, ComponentLink10URL=https://datasheet.ciiva.com/26841/ft232rl-reel-26841080.pdf, Data Rate=12Mbps, DatasheetVersion="ver 2.07, Jul-2010", Height=1.75mm, Interface=RS-232,RS-422,RS-485,UART, Lead Free="Lead Free", Length=10.2mm, Mount="Surface Mount", Number of Channels=1, Number of Pins=28, Number of Transceivers=1, PackageDescription="28-Pin Small Outline Package 0.65 mm Pitch", PackageReference=SSOP-28, PackageVersion=2010, Packaging="Tape and Reel", Pricing 1="1=4.5, 10=4.05, 100=3.65, 250=3.25, 500=2.85002, 1000=2.65 (USD)", Published=19-Aug-2010, Publisher="Altium Limited", Radiation Hardening=No, REACH SVHC="No SVHC", Stock 1=216496, Supplier 1=Digi-Key, Supplier 2=Digi-Key, Weight=0.080001oz, Width=5.3mm
U5: "SOIC", Supplier Part Number=MCP2515T-I/SOCT-ND, Supplier 1=Digi-Key
Y1 Y2: Capacitance=15pF, Case/Package=SMD/SMT, Frequency=16MHz, Frequency Stability=0.15%, Frequency Tolerance=0.5%, Manufacturer=Murata, Manufacturer Part Number=CSTCE16M0V53C-R0, Max Operating Temperature=125°C, Min Operating Temperature=-40°C, Package Quantity=3000, Supplier Part Number=490-17948-1-ND, ComponentLink1Description=https://datasheet.ciiva.com/16430/cstce16m0v53c-r0-16430704.pdf, ComponentLink1URL=https://datasheet.ciiva.com/16430/cstce16m0v53c-r0-16430704.pdf, ComponentLink2Description=https://datasheet.ciiva.com/14132/ceralock-eng-bro-14132709.pdf, ComponentLink2URL=https://datasheet.ciiva.com/14132/ceralock-eng-bro-14132709.pdf, ComponentLink3Description=https://datasheet.ciiva.com/29617/l0430e-29617948.pdf, ComponentLink3URL=https://datasheet.ciiva.com/29617/l0430e-29617948.pdf, ComponentLink4Description=https://datasheet.ciiva.com/29617/l0430e-29617949.pdf, ComponentLink4URL=https://datasheet.ciiva.com/29617/l0430e-29617949.pdf, ComponentLink5Description=https://datasheet.ciiva.com/29617/l0430e-29617950.pdf, ComponentLink5URL=https://datasheet.ciiva.com/29617/l0430e-29617950.pdf, ComponentLink6Description=https://datasheet.ciiva.com/26812/getdatasheetpartid-418508-26812063.pdf, ComponentLink6URL=https://datasheet.ciiva.com/26812/getdatasheetpartid-418508-26812063.pdf, Composition=Ceramic, Contact Plating=Gold, Height=0.031inch, Lead Free="Lead Free", Length=0.126inch, Mount="Surface Mount", Number of Pins=3, Packaging="Tape and Reel", REACH SVHC="No SVHC", Stock 1=0, Supplier 1=Digi-Key, Termination=SMD/SMT, Tolerance=0.5%, Width=0.051inch

## Via types
v1: diameter 0.5, hole 0.3, Top Layer to Bottom Layer, 59 vias
v2: diameter 1.5, hole 1.02, Top Layer to Bottom Layer, 18 vias

## Nets (pads, with @x,y where several pads share a name; then routed paths per layer and width w, separated by ;. In a path a pad name is that pad's centre, name@x,y a point inside that pad or via, vN(x,y) a via of type N, cw(c..) or ccw(c..) an arc to the next point about the centre after c; other vN are vias at no path point)
+3.3V: C7.1 U4.17 | length 6
  Top Layer w0.35: v1(152.675,69.05) 152.675,66.324 153.137,65.862 154.204,65.862 154.417,66.075 U4.17
+5V: C1.1 C2.1 C4.1 C5.1 C6.1 D2.1 D4.2 D6.1 D7.1 P1.4 R1.1 R7.1 R9.2 R10.2 U1.4 U1.6 U1.18 U2.2 U2.4 U3.3 U4.4 U4.20 U5.18 | length 131.2
  Top Layer w0.35: U4.4 150.117,71.275 v1(150.19,71.349) ; v1(154.051,68.377) 154.051,68.351 154.377,68.025 U4.20
  Top Layer w0.5: U1.4 140.438,58.937
  Top Layer w0.55: U1.6 142.038,57.337 ; 140.438,58.937 142.038,57.337 ; U1.18 143.062,56.537 v1(142.95,56.425) 142.038,57.337
  Top Layer w1: U5.18@141.73,77.605 U5.18 142.92,78.1 U2.4 148.05,81.25 ; U2.2 148.05,81.25 ; D2.1 148.175,81.125 148.05,81.25
  Bottom Layer w0.35: v1(154.051,68.377) 154.051,69.901 154.127,69.977
  Bottom Layer w1: R7.1 129.65,77.925 R10.2 129.9,77.775 134.229,77.775 ; P1.4 129.82,65.65 137.025,65.65 ; v1(135.153,81.051) 133.426,81.051 132.842,80.467 132.842,79.162 134.229,77.775 ; v1(141.725,77.6) 141.55,77.775 R9.2 137.85,77.775 ; v1(142.95,56.425) C1.1 v1(142.95,60.675) 142.95,63.525 141.937,64.538 ; v1(148.775,78) 148.775,76.975 149.975,75.775 149.975,74.225 149.972,74.222 C6.1@149.972,71.855 ; C6.1@150.009,72.034 150.009,71.403 150.749,70.663 153.441,70.663 154.127,69.977 154.483,69.621 156.908,69.621 158.136,70.85 D7.1 ; D6.1 157.575,63.125 157.575,61.4 156.4,60.225 D4.2 150.825,62.55 147,62.55 145.012,64.538 141.937,64.538 ; 134.229,77.775 137.85,77.775 ; 137.025,65.65 140.825,65.65 141.937,64.538 ; 137.025,65.65 137.025,76.95 137.85,77.775
  other v1: 147.325,78
+12V: U2.3 | length 4.3
  Top Layer w1: U2.3 145.75,86.675 146.575,87.5 v2(146.95,87.5)
ADC0: U1.23
ADC1: U1.24
ADC2: U1.25 | length 20.5
  Top Layer w0.35: U1.25 145.895,62.737 147.009,61.623 147.009,61.547 147.561,60.995 148.555,60.995 v1(149.825,59.725)
  Bottom Layer w0.35: v2(149.075,47.267) 149.15,47.342 149.15,48.65 151.054,50.554 151.054,53.771 149.825,55 v1(149.825,59.725)
ADC3: U1.26 | length 21
  Top Layer w0.35: U1.26 143.569,61.606 v1(144.275,60.9) ; v1(150.375,52.9) 151.568,52.9 v1(152.15,53.482)
  Bottom Layer w0.35: v1(144.275,60.9) 144.4,60.775 144.4,57.675 147.725,54.35 149.312,54.35 150.375,53.287 v1(150.375,52.9) ; v2(151.6,48.3) 152.15,48.85 v1(152.15,53.482)
ADC4: U1.27 | length 22.5
  Top Layer w0.35: U1.27 142.769,63.463 143.416,64.11 145.356,64.11 147.599,61.867 147.599,61.792 147.806,61.585 149.131,61.585 150.657,60.058 v1(150.657,59.403) v1@150.668,59.403
  Bottom Layer w0.35: v1(150.657,59.403) 150.657,56.018 153.1,53.575 153.1,50 v2(153.7,49.4)
ADC5: U1.28 | length 23.6
  Top Layer w0.35: U1.28 141.969,63.498 143.171,64.7 145.601,64.7 148.126,62.175 149.375,62.175 151.425,60.125 v1(151.425,59.35)
  Bottom Layer w0.35: v1(151.425,59.35) 151.425,56.3 155.225,52.5 155.225,51.375 v2(155.7,50.9)
ADC6: U1.19 | length 14.2
  Top Layer w0.35: U1.19 146.687,57.337 147.15,57.8 149.955,57.8 150.53,57.225 150.58,57.275 v1(152.3,57.275)
  Bottom Layer w0.35: v1(152.3,57.275) 157.208,52.367 v2(157.5,52.367)
ADC7: U1.22 | length 15.8
  Top Layer w0.35: U1.22 148.853,59.737 150.537,58.053 v1(152.107,58.053)
  Bottom Layer w0.35: v1(152.107,58.053) 152.772,58.053 155.875,54.95 156.725,54.95 157.575,54.1 v2(159.2,54.1)
CANH: R8.1 U3.7 | length 8.4
  Top Layer w0.55: v2(139,87.5) 139,83.569 140.234,82.335 U3.7
  Bottom Layer w0.5: R8.1 139.85,82.35 v1(140.775,82.35)
CANL: R8.2 U3.6 | length 10.2
  Top Layer w0.55: U3.6 142.584,81.065 143,81.481 143,86.5 v2(142,87.5)
  Bottom Layer w0.5: R8.2 140.225,81.075 v1(140.775,81.075)
D0: R2.1 U1.30 | length 9.3
  Top Layer w0.55: U1.30 140.369,63.915 ; 140.373,63.915 140.373,64.376 v1(142.24,66.243)
  Bottom Layer w0.55: v1(142.24,66.243) 144.022,68.025 R2.1
D1: R3.1 U1.31 | length 10.9
  Top Layer w0.55: U1.31 139.569,64.944 140.589,65.964 v1(140.589,68.936)
  Bottom Layer w0.55: v1(140.589,68.936) 142.536,68.936 R3.1
D2/INTCAN: U1.32 U5.12 | length 10.1
  Top Layer w0.55: U1.32@138.765,62.737 138.765,65.689 139.548,66.472 139.548,69.418 140.114,69.985 U5.12
D3: U1.1
D4: U1.2
D5: U1.9 | length 20.8
  Top Layer w0.35: v1(128.35,54.425) 130.1,54.425 131.15,53.375 137.807,53.375 U1.9
  Bottom Layer w0.35: v1(128.35,54.425) 128.35,53.7 128.25,53.6 128.211,53.6 127.1,52.489 127.1,51.925 128.2,50.825 128.775,50.825 129.013,50.587 129.013,50.312 130.1,49.225 131.756,49.225 v2(132.131,49.6)
D6: U1.10 | length 14.6
  Top Layer w0.35: v1(129.325,53.5) 129.625,53.2 130.2,53.2 130.425,52.975 130.716,52.975 130.906,52.785 138.051,52.785 138.241,52.975 138.975,52.975 139.569,53.569 U1.10
  Bottom Layer w0.35: v1(129.325,53.5) 129.325,53.35 130.275,52.4 v2(130.275,50.967)
D7: U1.11 | length 13.5
  Top Layer w0.35: v2(128.556,52.278) 130.399,52.278 130.489,52.367 130.661,52.195 138.296,52.195 138.395,52.294 138.833,52.294 138.981,52.146 139.121,52.146 140.344,53.369 140.369,53.369 U1.11
D8: U1.12 | length 21.9
  Top Layer w0.35: v2(126.975,54.067) 126.6,53.692 126.6,52.325 128.038,50.888 128.9,50.888 128.9,50.35 129.662,49.588 130.137,49.588 131.525,48.2 133.1,48.2 135.275,50.375 138.65,50.375 141.169,52.894 U1.12
D9/CS: U1.13 U5.16 | length 64.1
  Top Layer w0.35: v2(125.675,55.917) 126.308,56.55 129.05,56.55 131.5,54.1 132.725,54.1 133.475,54.85 v1(137.15,54.85)
  Top Layer w0.55: 140.065,75.065 U5.16 143.451,75.065 144.026,74.49 144.026,72.382 145.339,71.069 145.339,65.986 148.05,63.275 150.5,63.275 152.81,60.965 152.81,58.83 153.079,58.561 153.079,53.309 149.96,50.19 143.51,50.19 141.969,51.731 U1.13
  Bottom Layer w0.35: v1(137.15,54.85) v1(141.969,54.85)
D10: U1.14 | length 27.5
  Top Layer w0.55: U1.14 142.769,52.331 v1(143.9,51.2)
  Bottom Layer w0.55: v2(124.675,57.767) 125.408,58.5 126.075,58.5 126.437,58.862 126.949,58.862 128.762,57.049 128.762,55.237 132.799,51.2 v1(143.9,51.2)
D11/MOSI: P1.5 U1.15 U5.14 | length 51.5
  Top Layer w0.55: v1(127.576,66.167) 128.222,66.167 130.374,64.015 P1.5 132.064,65.354 134.823,65.354 137.135,67.666 137.135,71.628 138.032,72.525 U5.14
  Bottom Layer w0.5: P1.5 132.011,62.729 132.011,56.314 134.229,54.096 142.821,54.096
  Bottom Layer w0.55: v2(123.775,59.667) 124.333,60.225 125.1,60.225 125.5,60.625 125.5,64.638 127.03,66.167 v1(127.576,66.167) ; 142.821,54.096 v1(143.575,54.85)
D12/MISO: P1.1 U1.16 U5.15 | length 58.1
  Top Layer w0.55: v2(123.075,61.767) 123.367,61.475 126.925,61.475 ; P1.1 126.925,61.475 ; U5.15 137.473,73.795 135.814,72.136 135.814,67.996 134.307,66.489 129.3,66.489 128.639,67.15 126.661,67.15 125.675,66.164 125.675,62.725 126.925,61.475 ; v1(144.369,52.294) U1.16
  Bottom Layer w0.5: P1.1 129.7,59.96 129.7,55.625 133.275,52.05
  Bottom Layer w0.55: 133.275,52.05 133.304,52.079 143.892,52.079 143.921,52.05 144.175,52.05 144.369,52.244 v1(144.369,52.294)
D13/SCK: P1.2 R4.2 U1.17 U5.13 | length 65.9
  Top Layer w0.55: v1(131.826,55.067) 133.1,56.341 133.1,58.627 135.103,60.63 135.103,64.008 138.43,67.335 138.43,70.536 139.149,71.255 U5.13
  Bottom Layer w0.35: v2(122.6,64) 122.934,64.334 123.934,64.334 126.6,67 127.719,67 128.4,66.319 128.4,65.865 127.835,65.3 127.4,65.3 126.7,64.6 126.7,63.3 127.271,62.729 129.471,62.729 P1.2
  Bottom Layer w0.55: P1.2 130.725,56.125 133.775,53.075 143.875,53.075 145.225,54.425 v1(145.225,55.725) 147.775,53.175 R4.2
GND: C1.2 C2.2 C3.2 C4.2 C5.2 C6.2 C7.2 C9.2 C10.2 D1.2 J1.5 P1.6 R5.2 R6.1 U1.3 U1.5 U1.21 U2.1 U3.2 U4.7 U4.18 U4.21 U4.25 U4.26 U5.9 Y1.2 Y2.2 | length 1.7
  Top Layer w0.35: v1(154.051,72.034) 154.16,71.925 U4.26
  other v1: 134.7,56.9 136.855,58.15 137.897,58.141 145.486,58.958 136.855,59.741 129.025,69.95
NetC3_1: C3.1 U1.20 | length 3.7
  Bottom Layer w0.254: C3.1@148.375,58.3 C3.1
  Bottom Layer w0.55: v1(145.225,58.125) 145.604,57.746 147.821,57.746 C3.1@148.375,58.3
NetC8_2: C8.2 U4.19
NetD1_1: D1.1 R4.1
  other v1: 148.5,56.15
NetD2_2: D2.2 R5.1
  other v1: 156.125,81.125
NetD3_1: D3.1 R7.2
  other v1: 126.8,74.875
NetD3_2: D3.2 U3.1 U5.1 | length 16.8
  Top Layer w0.5: D3.2 128.45,80.025 129.775,80.025 ; U5.1 132.825,78.4 131.2,80.025 129.775,80.025 ; U3.1 131.23,83.605 129.775,82.15 129.775,80.025
NetD5_1: D5.1 R10.1
  other v1: 129.725,74.9
NetD5_2: D5.2 U3.4 U5.2 | length 9.4
  Top Layer w0.5: D5.2 131.79,76.335 U5.2 134.185,76.335
  Top Layer w0.55: 134.185,76.335 135.675,77.825 U3.4
NetD6_2: D6.2 R11.2 | length 2.4
  Bottom Layer w0.55: R11.2@156.595,66.624 R11.2 157.6,66.65 D6.2
NetD7_2: D7.2 R12.2 | length 3.1
  Bottom Layer w0.55: R12.2 157.908,73.683 D7.2
NetF1_2: F1.2 J1.1 | length 8.7
  Top Layer w0.35: 158.665,65.43 159.68,65.43 160.1,65.85 J1.1
  Top Layer w0.55: F1.2 156.775,63.675 158.53,65.43 158.665,65.43
NetR6_2: R6.2 U3.8 | length 5.2
  Bottom Layer w0.5: R6.2 137.175,83.775 137.725,84.325 140.45,84.325 140.775,84 v1(140.775,83.625)
NetR9_1: R9.1 U5.17 | length 2.6
  Bottom Layer w0.5: R9.1 140.2,75.95 140.6,76.35 v1(141.725,76.35)
NetR11_1: R11.1 U4.23 | length 5.6
  Top Layer w0.35: v1(153.793,66.679) 153.372,67.1 153.372,69.679 153.668,69.975 U4.23
NetR12_1: R12.1 U4.22 | length 6.6
  Top Layer w0.35: U4.22 155.746,69.371 156.825,69.371 157.179,69.725 157.179,71.886 v1(157.556,72.263)
  Bottom Layer w0.35: R12.1 156.277,70.983 v1(157.556,72.263)
NetU1_7: U1.7 Y1.1 | length 3.1
  Top Layer w0.5: v1(135.475,58.15) 135.7,57.925 135.7,56.925 136.088,56.537
  Top Layer w0.55: 136.088,56.537 U1.7
NetU1_8: U1.8 Y1.3 | length 1.9
  Top Layer w0.55: v1(135.475,55.737) U1.8
NetU5_7: U5.7 Y2.3 | length 4.3
  Top Layer w0.5: 130.625,71.15 131.79,69.985 U5.7
  Top Layer w0.55: Y2.3 130.625,71.15
NetU5_8: U5.8 Y2.1 | length 3.8
  Top Layer w0.55: Y2.1 129.06,68.715 U5.8
RESET: C8.1 P1.3 R1.2 S1.1 U1.29 | length 37.6
  Top Layer w0.5: 132.131,60.554 132.979,60.554 P1.3@133.265,60.84
  Top Layer w0.55: S1.1 131.75,60.173 132.131,60.554 ; P1.3@133.265,60.84 P1.3 ; U1.29 141.169,63.674 v1(143.231,65.735) ; v1(158.42,69.367) 158.575,69.523 C8.1
  Bottom Layer w0.5: P1.3 134.015,62.225 ; R1.2 141.15,61.575 v1(141.15,62.225)
  Bottom Layer w0.55: 134.015,62.225 v1(141.15,62.225) ; v1(143.231,65.735) 146.609,65.735 147.066,65.278 155.118,65.278 155.397,65.557 155.397,67.555 156.016,68.174 156.895,68.174 158.089,69.367 v1(158.42,69.367)
RXD: P2.2 R2.2 U4.5 | length 14.9
  Top Layer w0.35: v1(146.525,70.725) 146.625,70.625 U4.5 150.533,70.625 154.457,74.549 155.464,74.549 P2.2
TXD: P2.1 R3.2 U4.1 | length 12.9
  Top Layer w0.35: v1(144.805,73.225) U4.1 151.6,73.225 P2.1
USBD+: J1.3 U4.15 | length 6.4
  Top Layer w0.35: U4.15 156.85,64.775 158.471,66.396 159.537,66.396 159.854,66.712 159.854,66.786 160.218,67.15 J1.3
USBD-: J1.2 U4.16 | length 12.5
  Top Layer w0.35: v1(155.423,64.059) 154.584,64.059 154.194,64.449 154.194,64.999 154.621,65.425 U4.16 ; J1.2 162.024,66.5 v1(162.179,66.345)
  Bottom Layer w0.35: v1(155.423,64.059) 156.134,64.059 158.42,66.345 v1(162.179,66.345)
VUSB: C9.1 C10.1 D4.1 F1.1 | length 18.1